# EAGLE board 13240-tsunami-panel.v10 (EAGLE 7.5.0), part 1 of 5
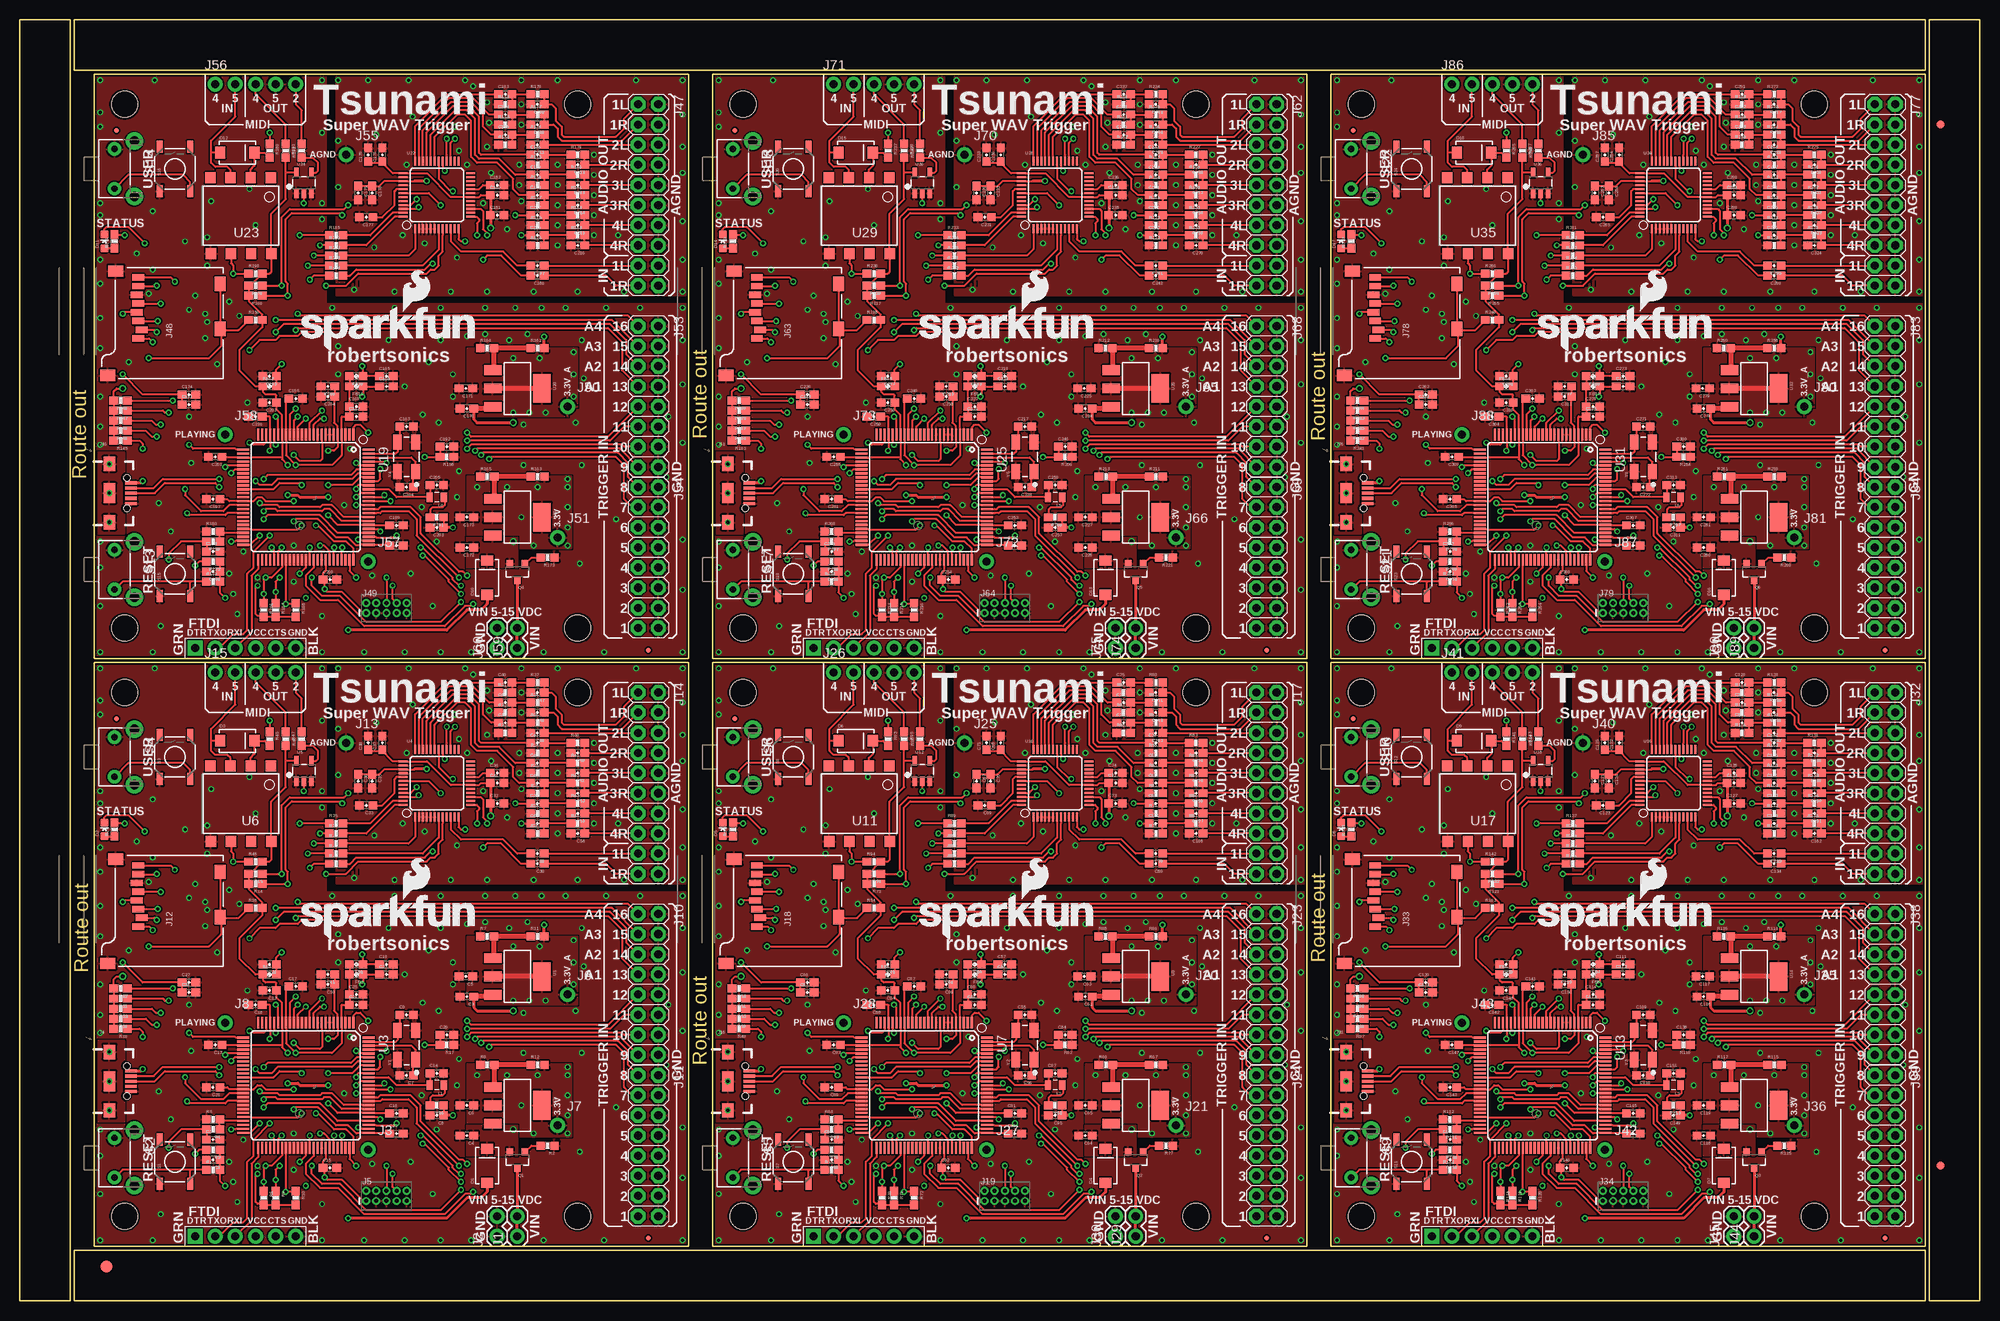
[diagram p0: board, top side]
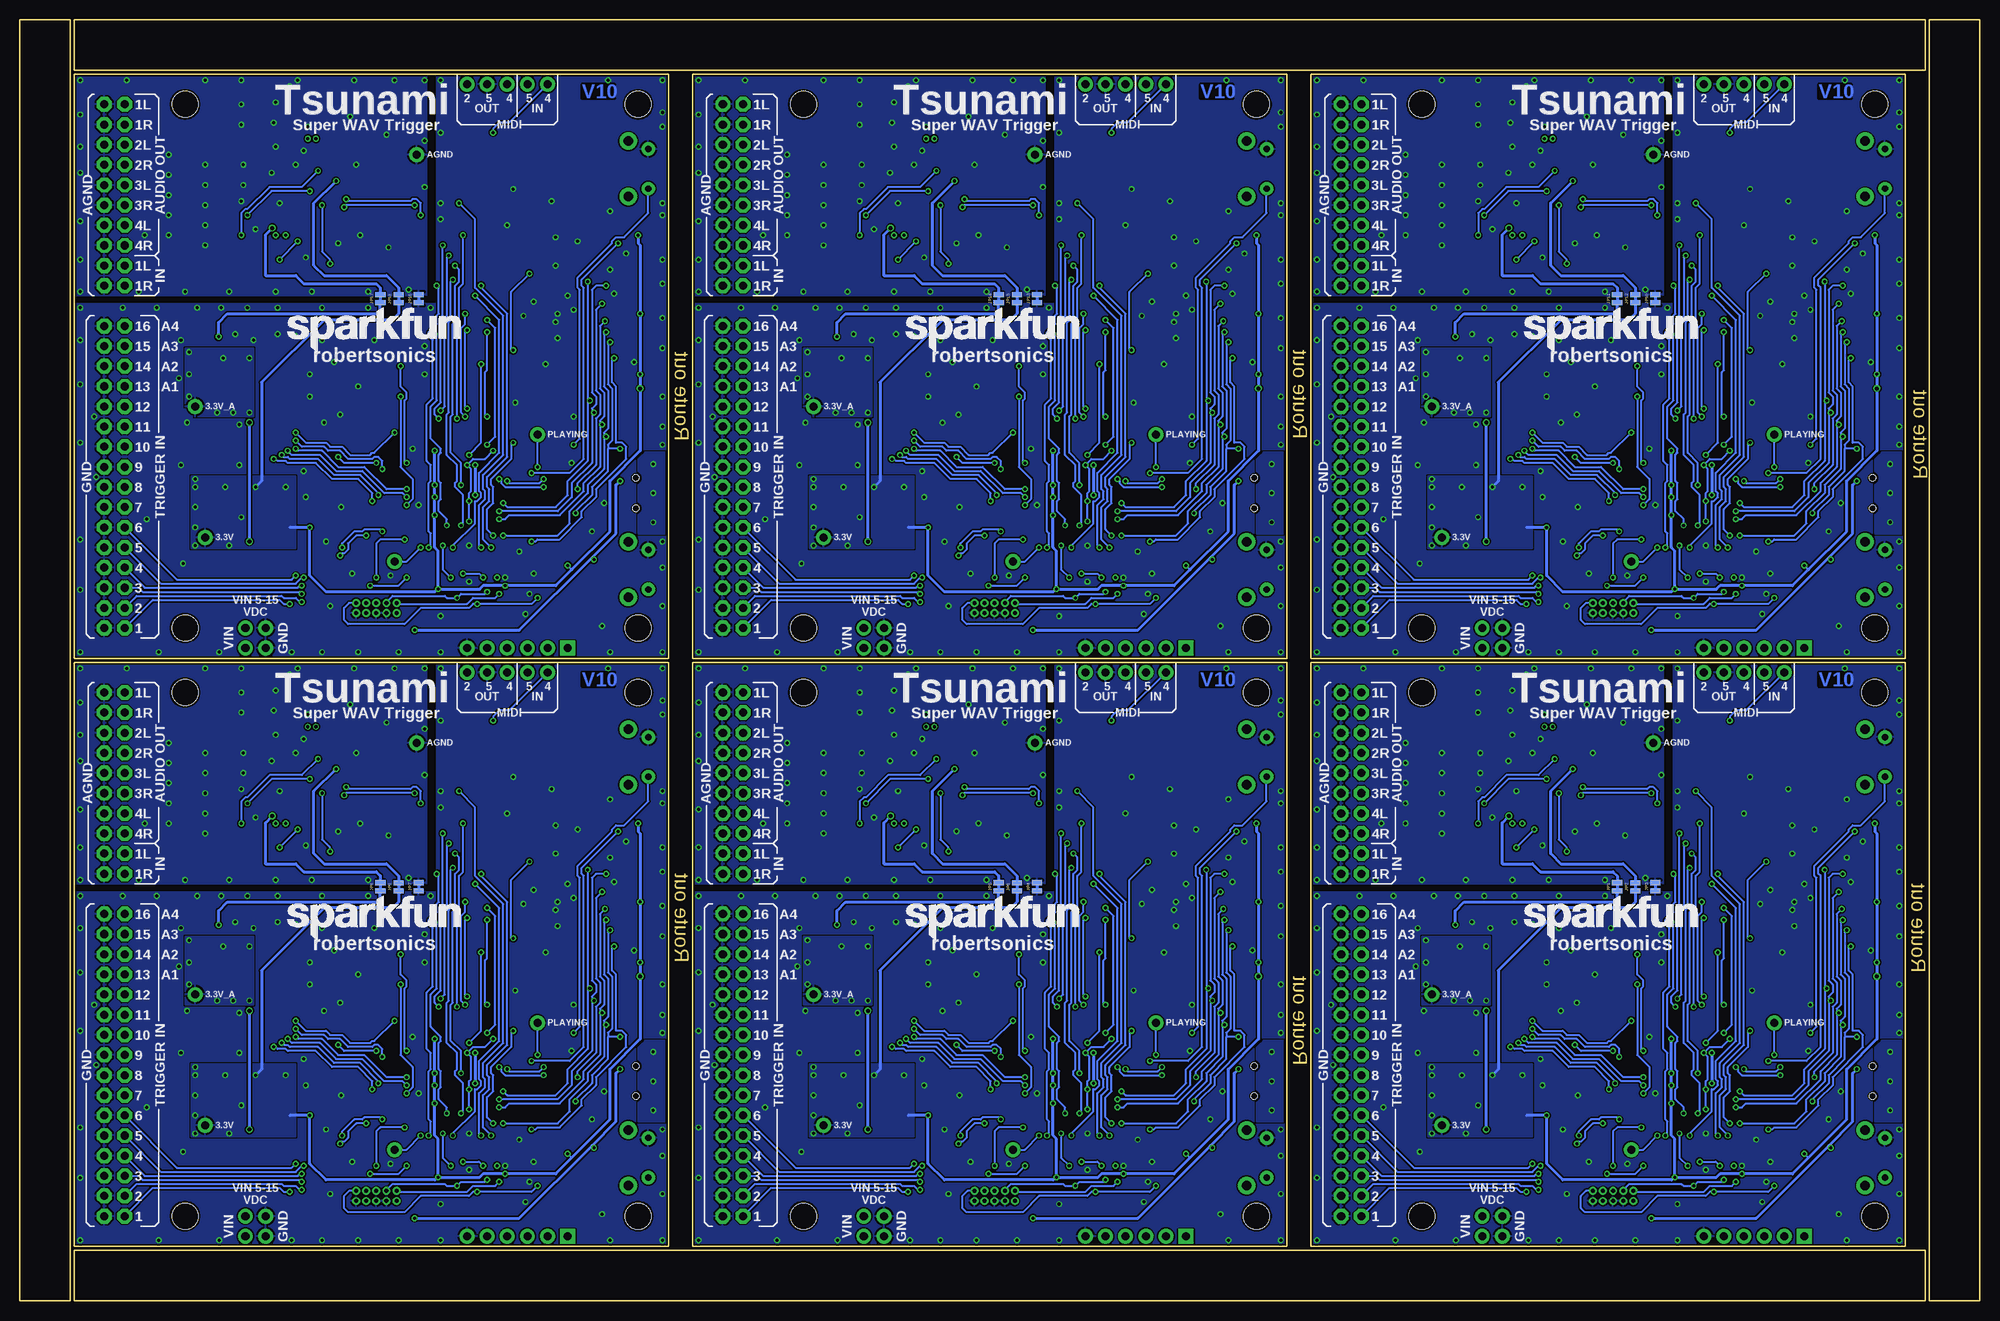
[diagram p1: board, bottom side, seen from below]

Size 247.14 x 161.54 mm. Coordinates in mm from the lower left corner, seen from the top.
Outline: 6.35,79.25 6.35,0 0,0 0,29.72
Outline: 0,27.18 0,161.54 6.35,161.54 6.35,76.71
Outline: 79.25,0 6.86,0 6.86,6.35 29.72,6.35
Outline: 27.18,6.35 240.28,6.35 240.28,0 76.71,0
Outline: 167.89,161.54 240.28,161.54 240.28,155.19 217.42,155.19
Outline: 219.96,155.19 6.86,155.19 6.86,161.54 170.43,161.54
Outline: 240.79,82.3 240.79,161.54 247.14,161.54 247.14,131.83
Outline: 247.14,134.37 247.14,0 240.79,0 240.79,84.84
Outline: 9.4,6.86 84.33,6.86 84.33,80.52 9.4,80.52 9.4,6.86
Outline: 87.38,6.86 162.31,6.86 162.31,80.52 87.38,80.52 87.38,6.86
Outline: 165.35,6.86 240.28,6.86 240.28,80.52 165.35,80.52 165.35,6.86
Outline: 9.4,81.03 84.33,81.03 84.33,154.69 9.4,154.69 9.4,81.03
Outline: 87.38,81.03 162.31,81.03 162.31,154.69 87.38,154.69 87.38,81.03
Outline: 165.35,81.03 240.28,81.03 240.28,154.69 165.35,154.69 165.35,81.03
Copper layers (1*16): Top 0.035mm / dielectric 1.5mm / Bottom 0.035mm
Design rules "SparkFun-2-layer-TIGHT": minimum track width 7mil, minimum drill 15mil, track to track 7mil, track to pad 7mil, pad to pad 7mil, via to via 7mil, smd to smd 7mil, copper to edge 7mil, drill to drill 7mil, minimum pad ring 7mil, minimum via ring 7mil, stop-mask expansion 4mil, vias tented up to drill 20mil, thermal gap 10mil
tRestrict: area 41.1,53.7 to 41.3,54.5; area 41.7,53.7 to 41.8,54.5; area 42.2,53.7 to 42.3,54.5; area 42.7,53.7 to 42.8,54.5; area 29.3,27.8 to 29.5,28.6; area 29.8,27.8 to 30,28.6; area 119.1,53.7 to 119.3,54.5; area 119.6,53.7 to 119.8,54.5; area 120.1,53.7 to 120.3,54.5; area 120.7,53.7 to 120.8,54.5; area 107.3,27.8 to 107.4,28.6; area 107.8,27.8 to 108,28.6; area 197.1,53.7 to 197.2,54.5; area 197.6,53.7 to 197.7,54.5; area 198.1,53.7 to 198.2,54.5; area 198.6,53.7 to 198.8,54.5; area 185.3,27.8 to 185.4,28.6; area 185.8,27.8 to 185.9,28.6; area 41.1,127.9 to 41.3,128.7; area 41.7,127.9 to 41.8,128.7; area 42.2,127.9 to 42.3,128.7; area 42.7,127.9 to 42.8,128.7; area 29.3,102 to 29.5,102.7; area 29.8,102 to 30,102.7; area 119.1,127.9 to 119.3,128.7; area 119.6,127.9 to 119.8,128.7; area 120.1,127.9 to 120.3,128.7; area 120.7,127.9 to 120.8,128.7; area 107.3,102 to 107.4,102.7; area 107.8,102 to 108,102.7; area 197.1,127.9 to 197.2,128.7; area 197.6,127.9 to 197.7,128.7; area 198.1,127.9 to 198.2,128.7; area 198.6,127.9 to 198.8,128.7; area 185.3,102 to 185.4,102.7; area 185.8,102 to 185.9,102.7

## Footprints (pad centres in the part's own frame; a part is rotated, then mirrored left to right if it is on the bottom)
0603-CAP = smd 1.1 x 1: 1 -0.85,0; 2 0.85,0
SMA-DIODE = smd 1.27 x 1.47: A -2.15,0; C 2.15,0
LED-0603 = smd 1 x 1: A 0,-0.877; C 0,0.877
FIDUCIAL-1.5X3 = smd 1.5 x 1.5: 1 0,0
FIDUCIAL-1X2 = smd 1 x 1: 1 0,0
0603 = smd 1.1 x 1: 1 -0.85,0; 2 0.85,0
MICRO-FIDUCIAL = smd 0.635 x 0.635: 1 0,0
STAND-OFF = hole 3.302: 0,0
1X02 = drill 1.016 pad 1.88: 1 0,0; 2 2.54,0
1X01_NO_SILK = drill 1.016 pad 1.88: 1 0,0
USB-B-MICRO-SMD_V03 = smd 1.45 x 0.4: D+ 2.725,0; D- 2.725,0.65; GND 2.725,-1.3; ID 2.725,-0.65; VBUS 2.725,1.3 | smd 1.5 x 1.8: SHIELD1 0,3.685; SHIELD2 0,-3.685 | smd 1.5 x 2.5: SHIELD3 0,0 | hole 0.85: 2.2,1.9; 2.2,-1.9
2X5-PTH-1.27MM = drill 0.508 pad 1: 1 -2.54,-0.635; 2 -2.54,0.635; 3 -1.27,-0.635; 4 -1.27,0.635; 5 0,-0.635; 6 0,0.635; 7 1.27,-0.635; 8 1.27,0.635; 9 2.54,-0.635; 10 2.54,0.635
FTDI_DEVICE_SIDE = drill 1.016 pad 1.88 square: P$1 -6.35,0 | drill 1.016 pad 1.88: P$2 -3.81,0; P$3 -1.27,0; P$4 1.27,0; P$5 3.81,0; P$6 6.35,0
2X8 = drill 1.016 pad 1.88 octagon: 1 0,0; 2 0,2.54; 3 2.54,0; 4 2.54,2.54; 5 5.08,0; 6 5.08,2.54; 7 7.62,0; 8 7.62,2.54; 9 10.16,0; 10 10.16,2.54; 11 12.7,0; 12 12.7,2.54; 13 15.24,0; 14 15.24,2.54; 15 17.78,0; 16 17.78,2.54
MICRO-SD-SOCKET-SDIO = smd 1.8 x 1.4: CD1 11.92,0.4; CD2 6.22,0.4 | smd 0.8 x 1.5: CD/DAT3 6.13,10.3; CLK 9.43,10.7; CMD 7.23,10.7; DAT0 11.63,10.7; DAT1 12.73,10.7; DAT2 5.03,10.7; GND 10.53,10.9; VCC 8.33,10.9 | smd 1.4 x 1.9: GND1 0.37,14.55; GND3 13.52,13.55
2X10 = drill 1.016 pad 1.88 octagon: 1 -11.43,-1.27; 2 -11.43,1.27; 3 -8.89,-1.27; 4 -8.89,1.27; 5 -6.35,-1.27; 6 -6.35,1.27; 7 -3.81,-1.27; 8 -3.81,1.27; 9 -1.27,-1.27; 10 -1.27,1.27; 11 1.27,-1.27; 12 1.27,1.27; 13 3.81,-1.27; 14 3.81,1.27; 15 6.35,-1.27; 16 6.35,1.27; 17 8.89,-1.27; 18 8.89,1.27; 19 11.43,-1.27; 20 11.43,1.27
1X05_NO_SILK = drill 1.016 pad 1.88: 1 0,0; 2 2.54,0; 3 5.08,0; 4 7.62,0; 5 10.16,0
PAD-JUMPER-2-NC_BY_TRACE_NO_SILK = smd 0.635 x 1.27: 1 -0.508,0; 2 0.508,0
0805 = smd 0.8 x 1.2: 1 -0.9,0; 2 0.9,0
SOT23-3 = smd 0.8 x 0.9: 1 -0.95,-1; 2 0.95,-1; 3 0,1.1
0603-RES = smd 1.1 x 1: 1 -0.85,0; 2 0.85,0
TACTILE-SWITCH-SMD = smd 1.524 x 0.762: 1 -2.794,1.905; 2 2.794,1.905; 3 -2.794,-1.905; 4 2.794,-1.905
TACTILE-PTH-SIDEEZ = drill 0.8 pad 1.7: 1 -2.5,0; 2 2.5,0 | drill 1.2 pad 2.2: ANCHOR1 -3.5,2.5; ANCHOR2 3.5,2.5
TP_15TH = drill 0.381 pad 0.61: P$1 0,0
SOT223 = smd 1.219 x 2.235: 1 -2.311,-3.099; 2 0,-3.099; 3 2.311,-3.099 | smd 3.6 x 2.2: 4 0,3.099
LQFP100 = smd 1.5 x 0.28: 1 -7.9,6; 2 -7.9,5.5; 3 -7.9,5; 4 -7.9,4.5; 5 -7.9,4; 6 -7.9,3.5; 7 -7.9,3; 8 -7.9,2.5; 9 -7.9,2; 10 -7.9,1.5; 11 -7.9,1; 12 -7.9,0.5; 13 -7.9,0; 14 -7.9,-0.5; 15 -7.9,-1; 16 -7.9,-1.5; 17 -7.9,-2; 18 -7.9,-2.5; 19 -7.9,-3; 20 -7.9,-3.5; 21 -7.9,-4; 22 -7.9,-4.5; 23 -7.9,-5; 24 -7.9,-5.5; 25 -7.9,-6; 51 7.9,-6; 52 7.9,-5.5; 53 7.9,-5; 54 7.9,-4.5; 55 7.9,-4; 56 7.9,-3.5; 57 7.9,-3; 58 7.9,-2.5; 59 7.9,-2; 60 7.9,-1.5; 61 7.9,-1; 62 7.9,-0.5; 63 7.9,0; 64 7.9,0.5; 65 7.9,1; 66 7.9,1.5; 67 7.9,2; 68 7.9,2.5; 69 7.9,3; 70 7.9,3.5; 71 7.9,4; 72 7.9,4.5; 73 7.9,5; 74 7.9,5.5; 75 7.9,6 | smd 0.28 x 1.5: 26 -6,-7.9; 27 -5.5,-7.9; 28 -5,-7.9; 29 -4.5,-7.9; 30 -4,-7.9; 31 -3.5,-7.9; 32 -3,-7.9; 33 -2.5,-7.9; 34 -2,-7.9; 35 -1.5,-7.9; 36 -1,-7.9; 37 -0.5,-7.9; 38 0,-7.9; 39 0.5,-7.9; 40 1,-7.9; 41 1.5,-7.9; 42 2,-7.9; 43 2.5,-7.9; 44 3,-7.9; 45 3.5,-7.9; 46 4,-7.9; 47 4.5,-7.9; 48 5,-7.9; 49 5.5,-7.9; 50 6,-7.9; 76 6,7.9; 77 5.5,7.9; 78 5,7.9; 79 4.5,7.9; 80 4,7.9; 81 3.5,7.9; 82 3,7.9; 83 2.5,7.9; 84 2,7.9; 85 1.5,7.9; 86 1,7.9; 87 0.5,7.9; 88 0,7.9; 89 -0.5,7.9; 90 -1,7.9; 91 -1.5,7.9; 92 -2,7.9; 93 -2.5,7.9; 94 -3,7.9; 95 -3.5,7.9; 96 -4,7.9; 97 -4.5,7.9; 98 -5,7.9; 99 -5.5,7.9; 100 -6,7.9
LQFP-48 = smd 0.254 x 1.143: 1 -2.75,-4.25; 2 -2.25,-4.25; 3 -1.75,-4.25; 4 -1.25,-4.25; 5 -0.75,-4.25; 6 -0.25,-4.25; 7 0.25,-4.25; 8 0.75,-4.25; 9 1.25,-4.25; 10 1.75,-4.25; 11 2.25,-4.25; 12 2.75,-4.25; 25 2.75,4.25; 26 2.25,4.25; 27 1.75,4.25; 28 1.25,4.25; 29 0.75,4.25; 30 0.25,4.25; 31 -0.25,4.25; 32 -0.75,4.25; 33 -1.25,4.25; 34 -1.75,4.25; 35 -2.25,4.25; 36 -2.75,4.25 | smd 1.143 x 0.254: 13 4.25,-2.75; 14 4.25,-2.25; 15 4.25,-1.75; 16 4.25,-1.25; 17 4.25,-0.75; 18 4.25,-0.25; 19 4.25,0.25; 20 4.25,0.75; 21 4.25,1.25; 22 4.25,1.75; 23 4.25,2.25; 24 4.25,2.75; 37 -4.25,2.75; 38 -4.25,2.25; 39 -4.25,1.75; 40 -4.25,1.25; 41 -4.25,0.75; 42 -4.25,0.25; 43 -4.25,-0.25; 44 -4.25,-0.75; 45 -4.25,-1.25; 46 -4.25,-1.75; 47 -4.25,-2.25; 48 -4.25,-2.75
SOT23-5 = smd 0.55 x 1.2: 1 -0.95,-1.3; 2 0,-1.3; 3 0.95,-1.3; 4 0.95,1.3; 5 -0.95,1.3
8-SMD = smd 1.3 x 1.4: 1 -3.96,-4.96; 2 -1.42,-4.96; 3 1.12,-4.96; 4 3.66,-4.96; 5 3.59,4.58; 6 1.05,4.58; 7 -1.49,4.58; 8 -4.03,4.58
CRYSTAL-OSC-SMD-5X3 = smd 1.9 x 1.1: 1 -1.85,-1.15; 2 1.85,-1.15; 3 1.85,1.15; 4 -1.85,1.15

## Placement (x,y rotation side)
C1  10nF  [0603-CAP]  24.38,17.78 180 top
C2  10uF  [0603-CAP]  24.38,20.32 0 top
C3  0.1uF  [0603-CAP]  56.39,38.35 180 top
C4  0.1uF  [0603-CAP]  56.39,20.83 180 top
C5  10uF  [0603-CAP]  56.26,40.89 180 top
C6  10uF  [0603-CAP]  56.39,24.64 180 top
C7  12pF  [0603-CAP]  48.77,28.45 180 top
C8  0.1uF  [0603-CAP]  52.58,23.37 180 top
C9  12pF  [0603-CAP]  48.77,36.07 0 top
C10  0.1uF  [0603-CAP]  38.86,39.88 180 top
C11  10uF  [0603-CAP]  38.86,41.15 180 top
C12  0.1uF  [0603-CAP]  31.5,39.12 180 top
C13  0.1uF  [0603-CAP]  24.64,32.26 180 top
C14  4.7uF  [0603-CAP]  52.58,28.7 0 top
C15  0.1uF  [0603-CAP]  39.12,16.76 0 top
C16  0.1uF  [0603-CAP]  47.5,23.62 0 top
C17  0.1uF  [0603-CAP]  34.8,39.62 0 top
C18  0.1uF  [0603-CAP]  29.72,37.34 180 top
C19  0.1uF  [0603-CAP]  46.23,42.42 0 top
C20  10pF  [0603-CAP]  53.85,33.53 0 top
C21  0.1uF  [0603-CAP]  24.38,26.92 180 top
C22  0.1uF  [0603-CAP]  47.5,21.08 0 top
C23  0.1uF  [0603-CAP]  46.23,41.15 0 top
C24  0.1uF  [0603-CAP]  42.42,37.34 0 top
C25  2.2uF  [0603-CAP]  42.42,38.61 0 top
C26  0.1uF  [0603-CAP]  31.5,42.42 180 top
C27  10uF  [0603-CAP]  21.34,40.13 0 top
C28  0.1uF  [0603-CAP]  21.34,38.86 0 top
C29  1.0uF  [0603-CAP]  65.28,56.39 180 top
C30  1.0uF  [0603-CAP]  65.28,55.12 180 top
C31  0.1uF  [0603-CAP]  60.2,65.28 0 top
C32  1.0uF  [0603-CAP]  60.2,62.74 0 top
C33  1.0uF  [0603-CAP]  43.69,62.48 180 top
C34  1.0uF  [0603-CAP]  60.2,66.55 0 top
C35  0.1uF  [0603-CAP]  44.45,65.53 270 top
C36  1.0uF  [0603-CAP]  42.67,65.53 270 top
C37  0.1uF  [0603-CAP]  45.72,70.36 90 top
C38  1.0uF  [0603-CAP]  43.94,70.36 90 top
C39  1.0uF  [0603-CAP]  65.28,62.74 0 top
C40  1.0uF  [0603-CAP]  61.21,77.98 0 top
C41  1.0uF  [0603-CAP]  65.28,70.36 0 top
C42  1.0uF  [0603-CAP]  65.28,60.2 0 top
C43  1.0uF  [0603-CAP]  61.21,75.44 0 top
C44  1.0uF  [0603-CAP]  65.28,67.82 0 top
C45  1.0uF  [0603-CAP]  61.21,72.9 0 top
C46  1.0uF  [0603-CAP]  65.28,65.28 0 top
C47  0.1uF  [0603-CAP]  65.28,76.71 180 top
C48  0.1uF  [0603-CAP]  65.28,74.17 180 top
C49  0.1uF  [0603-CAP]  65.28,71.63 180 top
C50  0.1uF  [0603-CAP]  70.36,69.09 180 top
C51  0.1uF  [0603-CAP]  70.36,66.55 180 top
C52  0.1uF  [0603-CAP]  70.36,64.01 180 top
C53  0.1uF  [0603-CAP]  70.36,61.47 180 top
C54  0.1uF  [0603-CAP]  70.36,58.93 180 top
C55  12pF  [0603-CAP]  126.75,36.07 0 top
C56  12pF  [0603-CAP]  126.75,28.45 180 top
C57  0.1uF  [0603-CAP]  124.21,42.42 0 top
C58  0.1uF  [0603-CAP]  124.21,41.15 0 top
C59  0.1uF  [0603-CAP]  120.4,37.34 0 top
C60  2.2uF  [0603-CAP]  120.4,38.61 0 top
C61  10uF  [0603-CAP]  116.84,41.15 180 top
C62  0.1uF  [0603-CAP]  134.37,38.35 180 top
C63  10uF  [0603-CAP]  134.24,40.89 180 top
C64  0.1uF  [0603-CAP]  134.37,20.83 180 top
C65  10uF  [0603-CAP]  134.37,24.64 180 top
C66  10uF  [0603-CAP]  99.31,40.13 0 top
C67  1.0uF  [0603-CAP]  120.65,65.53 270 top
C68  0.1uF  [0603-CAP]  123.7,70.36 90 top
C69  1.0uF  [0603-CAP]  121.67,62.48 180 top
C70  0.1uF  [0603-CAP]  122.43,65.53 270 top
C71  1.0uF  [0603-CAP]  121.92,70.36 90 top
C72  0.1uF  [0603-CAP]  138.18,65.28 0 top
C73  1.0uF  [0603-CAP]  138.18,62.74 0 top
C74  1.0uF  [0603-CAP]  138.18,66.55 0 top
C75  1.0uF  [0603-CAP]  139.19,77.98 0 top
C76  1.0uF  [0603-CAP]  139.19,75.44 0 top
C77  1.0uF  [0603-CAP]  139.19,72.9 0 top
C78  1.0uF  [0603-CAP]  143.26,70.36 0 top
C79  1.0uF  [0603-CAP]  143.26,56.39 180 top
C80  1.0uF  [0603-CAP]  143.26,55.12 180 top
C81  1.0uF  [0603-CAP]  143.26,67.82 0 top
C82  1.0uF  [0603-CAP]  143.26,65.28 0 top
C83  0.1uF  [0603-CAP]  99.31,38.86 0 top
C84  10pF  [0603-CAP]  131.83,33.53 0 top
C85  0.1uF  [0603-CAP]  109.47,42.42 180 top
C86  10uF  [0603-CAP]  102.36,20.32 0 top
C87  0.1uF  [0603-CAP]  112.78,39.62 0 top
C88  0.1uF  [0603-CAP]  107.7,37.34 180 top
C89  0.1uF  [0603-CAP]  102.36,26.92 180 top
C90  0.1uF  [0603-CAP]  125.48,21.08 0 top
C91  0.1uF  [0603-CAP]  125.48,23.62 0 top
C92  0.1uF  [0603-CAP]  117.09,16.76 0 top
C93  0.1uF  [0603-CAP]  102.62,32.26 180 top
C94  0.1uF  [0603-CAP]  109.47,39.12 180 top
C95  0.1uF  [0603-CAP]  130.56,23.37 180 top
C96  0.1uF  [0603-CAP]  116.84,39.88 180 top
C97  4.7uF  [0603-CAP]  130.56,28.7 0 top
C98  10nF  [0603-CAP]  102.36,17.78 180 top
C99  1.0uF  [0603-CAP]  143.26,62.74 0 top
C100  1.0uF  [0603-CAP]  143.26,60.2 0 top
C101  0.1uF  [0603-CAP]  143.26,76.71 180 top
C102  0.1uF  [0603-CAP]  143.26,74.17 180 top
C103  0.1uF  [0603-CAP]  143.26,71.63 180 top
C104  0.1uF  [0603-CAP]  148.34,69.09 180 top
C105  0.1uF  [0603-CAP]  148.34,66.55 180 top
C106  0.1uF  [0603-CAP]  148.34,64.01 180 top
C107  0.1uF  [0603-CAP]  148.34,61.47 180 top
C108  0.1uF  [0603-CAP]  148.34,58.93 180 top
C109  12pF  [0603-CAP]  204.72,36.07 0 top
C110  12pF  [0603-CAP]  204.72,28.45 180 top
C111  0.1uF  [0603-CAP]  202.18,42.42 0 top
C112  0.1uF  [0603-CAP]  202.18,41.15 0 top
C113  0.1uF  [0603-CAP]  198.37,37.34 0 top
C114  2.2uF  [0603-CAP]  198.37,38.61 0 top
C115  10uF  [0603-CAP]  194.82,41.15 180 top
C116  0.1uF  [0603-CAP]  212.34,38.35 180 top
C117  10uF  [0603-CAP]  212.22,40.89 180 top
C118  0.1uF  [0603-CAP]  212.34,20.83 180 top
C119  10uF  [0603-CAP]  212.34,24.64 180 top
C120  10uF  [0603-CAP]  177.29,40.13 0 top
C121  1.0uF  [0603-CAP]  198.63,65.53 270 top
C122  0.1uF  [0603-CAP]  201.68,70.36 90 top
C123  1.0uF  [0603-CAP]  199.64,62.48 180 top
C124  0.1uF  [0603-CAP]  200.41,65.53 270 top
C125  1.0uF  [0603-CAP]  199.9,70.36 90 top
C126  0.1uF  [0603-CAP]  216.15,65.28 0 top
C127  1.0uF  [0603-CAP]  216.15,62.74 0 top
C128  1.0uF  [0603-CAP]  216.15,66.55 0 top
C129  1.0uF  [0603-CAP]  217.17,77.98 0 top
C130  1.0uF  [0603-CAP]  217.17,75.44 0 top
C131  1.0uF  [0603-CAP]  217.17,72.9 0 top
C132  1.0uF  [0603-CAP]  221.23,70.36 0 top
C133  1.0uF  [0603-CAP]  221.23,56.39 180 top
C134  1.0uF  [0603-CAP]  221.23,55.12 180 top
C135  1.0uF  [0603-CAP]  221.23,67.82 0 top
C136  1.0uF  [0603-CAP]  221.23,65.28 0 top
C137  0.1uF  [0603-CAP]  177.29,38.86 0 top
C138  10pF  [0603-CAP]  209.8,33.53 0 top
C139  0.1uF  [0603-CAP]  187.45,42.42 180 top
C140  10uF  [0603-CAP]  180.34,20.32 0 top
C141  0.1uF  [0603-CAP]  190.75,39.62 0 top
C142  0.1uF  [0603-CAP]  185.67,37.34 180 top
C143  0.1uF  [0603-CAP]  180.34,26.92 180 top
C144  0.1uF  [0603-CAP]  203.45,21.08 0 top
C145  0.1uF  [0603-CAP]  203.45,23.62 0 top
C146  0.1uF  [0603-CAP]  195.07,16.76 0 top
C147  0.1uF  [0603-CAP]  180.59,32.26 180 top
C148  0.1uF  [0603-CAP]  187.45,39.12 180 top
C149  0.1uF  [0603-CAP]  208.53,23.37 180 top
C150  0.1uF  [0603-CAP]  194.82,39.88 180 top
C151  4.7uF  [0603-CAP]  208.53,28.7 0 top
C152  10nF  [0603-CAP]  180.34,17.78 180 top
C153  1.0uF  [0603-CAP]  221.23,62.74 0 top
C154  1.0uF  [0603-CAP]  221.23,60.2 0 top
C155  0.1uF  [0603-CAP]  221.23,76.71 180 top
C156  0.1uF  [0603-CAP]  221.23,74.17 180 top
C157  0.1uF  [0603-CAP]  221.23,71.63 180 top
C158  0.1uF  [0603-CAP]  226.31,69.09 180 top
C159  0.1uF  [0603-CAP]  226.31,66.55 180 top
C160  0.1uF  [0603-CAP]  226.31,64.01 180 top
C161  0.1uF  [0603-CAP]  226.31,61.47 180 top
C162  0.1uF  [0603-CAP]  226.31,58.93 180 top
C163  12pF  [0603-CAP]  48.77,110.24 0 top
C164  12pF  [0603-CAP]  48.77,102.62 180 top
C165  0.1uF  [0603-CAP]  46.23,116.59 0 top
C166  0.1uF  [0603-CAP]  46.23,115.32 0 top
C167  0.1uF  [0603-CAP]  42.42,111.51 0 top
C168  2.2uF  [0603-CAP]  42.42,112.78 0 top
C169  10uF  [0603-CAP]  38.86,115.32 180 top
C170  0.1uF  [0603-CAP]  56.39,112.52 180 top
C171  10uF  [0603-CAP]  56.26,115.06 180 top
C172  0.1uF  [0603-CAP]  56.39,95 180 top
C173  10uF  [0603-CAP]  56.39,98.81 180 top
C174  10uF  [0603-CAP]  21.34,114.3 0 top
C175  1.0uF  [0603-CAP]  42.67,139.7 270 top
C176  0.1uF  [0603-CAP]  45.72,144.53 90 top
C177  1.0uF  [0603-CAP]  43.69,136.65 180 top
C178  0.1uF  [0603-CAP]  44.45,139.7 270 top
C179  1.0uF  [0603-CAP]  43.94,144.53 90 top
C180  0.1uF  [0603-CAP]  60.2,139.45 0 top
C181  1.0uF  [0603-CAP]  60.2,136.91 0 top
C182  1.0uF  [0603-CAP]  60.2,140.72 0 top
C183  1.0uF  [0603-CAP]  61.21,152.15 0 top
C184  1.0uF  [0603-CAP]  61.21,149.61 0 top
C185  1.0uF  [0603-CAP]  61.21,147.07 0 top
C186  1.0uF  [0603-CAP]  65.28,144.53 0 top
C187  1.0uF  [0603-CAP]  65.28,130.56 180 top
C188  1.0uF  [0603-CAP]  65.28,129.29 180 top
C189  1.0uF  [0603-CAP]  65.28,141.99 0 top
C190  1.0uF  [0603-CAP]  65.28,139.45 0 top
C191  0.1uF  [0603-CAP]  21.34,113.03 0 top
C192  10pF  [0603-CAP]  53.85,107.7 0 top
C193  0.1uF  [0603-CAP]  31.5,116.59 180 top
C194  10uF  [0603-CAP]  24.38,94.49 0 top
C195  0.1uF  [0603-CAP]  34.8,113.79 0 top
C196  0.1uF  [0603-CAP]  29.72,111.51 180 top
C197  0.1uF  [0603-CAP]  24.38,101.09 180 top
C198  0.1uF  [0603-CAP]  47.5,95.25 0 top
C199  0.1uF  [0603-CAP]  47.5,97.79 0 top
C200  0.1uF  [0603-CAP]  39.12,90.93 0 top
C201  0.1uF  [0603-CAP]  24.64,106.43 180 top
C202  0.1uF  [0603-CAP]  31.5,113.28 180 top
C203  0.1uF  [0603-CAP]  52.58,97.54 180 top
C204  0.1uF  [0603-CAP]  38.86,114.05 180 top
C205  4.7uF  [0603-CAP]  52.58,102.87 0 top
C206  10nF  [0603-CAP]  24.38,91.95 180 top
C207  1.0uF  [0603-CAP]  65.28,136.91 0 top
C208  1.0uF  [0603-CAP]  65.28,134.37 0 top
C209  0.1uF  [0603-CAP]  65.28,150.88 180 top
C210  0.1uF  [0603-CAP]  65.28,148.34 180 top
C211  0.1uF  [0603-CAP]  65.28,145.8 180 top
C212  0.1uF  [0603-CAP]  70.36,143.26 180 top
C213  0.1uF  [0603-CAP]  70.36,140.72 180 top
C214  0.1uF  [0603-CAP]  70.36,138.18 180 top
C215  0.1uF  [0603-CAP]  70.36,135.64 180 top
C216  0.1uF  [0603-CAP]  70.36,133.1 180 top
C217  12pF  [0603-CAP]  126.75,110.24 0 top
C218  12pF  [0603-CAP]  126.75,102.62 180 top
C219  0.1uF  [0603-CAP]  124.21,116.59 0 top
C220  0.1uF  [0603-CAP]  124.21,115.32 0 top
C221  0.1uF  [0603-CAP]  120.4,111.51 0 top
C222  2.2uF  [0603-CAP]  120.4,112.78 0 top
C223  10uF  [0603-CAP]  116.84,115.32 180 top
C224  0.1uF  [0603-CAP]  134.37,112.52 180 top
C225  10uF  [0603-CAP]  134.24,115.06 180 top
C226  0.1uF  [0603-CAP]  134.37,95 180 top
C227  10uF  [0603-CAP]  134.37,98.81 180 top
C228  10uF  [0603-CAP]  99.31,114.3 0 top
C229  1.0uF  [0603-CAP]  120.65,139.7 270 top
C230  0.1uF  [0603-CAP]  123.7,144.53 90 top
C231  1.0uF  [0603-CAP]  121.67,136.65 180 top
C232  0.1uF  [0603-CAP]  122.43,139.7 270 top
C233  1.0uF  [0603-CAP]  121.92,144.53 90 top
C234  0.1uF  [0603-CAP]  138.18,139.45 0 top
C235  1.0uF  [0603-CAP]  138.18,136.91 0 top
C236  1.0uF  [0603-CAP]  138.18,140.72 0 top
C237  1.0uF  [0603-CAP]  139.19,152.15 0 top
C238  1.0uF  [0603-CAP]  139.19,149.61 0 top
C239  1.0uF  [0603-CAP]  139.19,147.07 0 top
C240  1.0uF  [0603-CAP]  143.26,144.53 0 top
C241  1.0uF  [0603-CAP]  143.26,130.56 180 top
C242  1.0uF  [0603-CAP]  143.26,129.29 180 top
C243  1.0uF  [0603-CAP]  143.26,141.99 0 top
C244  1.0uF  [0603-CAP]  143.26,139.45 0 top
C245  0.1uF  [0603-CAP]  99.31,113.03 0 top
C246  10pF  [0603-CAP]  131.83,107.7 0 top
C247  0.1uF  [0603-CAP]  109.47,116.59 180 top
C248  10uF  [0603-CAP]  102.36,94.49 0 top
C249  0.1uF  [0603-CAP]  112.78,113.79 0 top
C250  0.1uF  [0603-CAP]  107.7,111.51 180 top
C251  0.1uF  [0603-CAP]  102.36,101.09 180 top
C252  0.1uF  [0603-CAP]  125.48,95.25 0 top
C253  0.1uF  [0603-CAP]  125.48,97.79 0 top
C254  0.1uF  [0603-CAP]  117.09,90.93 0 top
C255  0.1uF  [0603-CAP]  102.62,106.43 180 top
C256  0.1uF  [0603-CAP]  109.47,113.28 180 top
C257  0.1uF  [0603-CAP]  130.56,97.54 180 top
C258  0.1uF  [0603-CAP]  116.84,114.05 180 top
C259  4.7uF  [0603-CAP]  130.56,102.87 0 top
C260  10nF  [0603-CAP]  102.36,91.95 180 top
C261  1.0uF  [0603-CAP]  143.26,136.91 0 top
C262  1.0uF  [0603-CAP]  143.26,134.37 0 top
C263  0.1uF  [0603-CAP]  143.26,150.88 180 top
C264  0.1uF  [0603-CAP]  143.26,148.34 180 top
C265  0.1uF  [0603-CAP]  143.26,145.8 180 top
C266  0.1uF  [0603-CAP]  148.34,143.26 180 top
C267  0.1uF  [0603-CAP]  148.34,140.72 180 top
C268  0.1uF  [0603-CAP]  148.34,138.18 180 top
C269  0.1uF  [0603-CAP]  148.34,135.64 180 top
C270  0.1uF  [0603-CAP]  148.34,133.1 180 top
C271  12pF  [0603-CAP]  204.72,110.24 0 top
C272  12pF  [0603-CAP]  204.72,102.62 180 top
C273  0.1uF  [0603-CAP]  202.18,116.59 0 top
C274  0.1uF  [0603-CAP]  202.18,115.32 0 top
C275  0.1uF  [0603-CAP]  198.37,111.51 0 top
C276  2.2uF  [0603-CAP]  198.37,112.78 0 top
C277  10uF  [0603-CAP]  194.82,115.32 180 top
C278  0.1uF  [0603-CAP]  212.34,112.52 180 top
C279  10uF  [0603-CAP]  212.22,115.06 180 top
C280  0.1uF  [0603-CAP]  212.34,95 180 top
C281  10uF  [0603-CAP]  212.34,98.81 180 top
C282  10uF  [0603-CAP]  177.29,114.3 0 top
C283  1.0uF  [0603-CAP]  198.63,139.7 270 top
C284  0.1uF  [0603-CAP]  201.68,144.53 90 top
C285  1.0uF  [0603-CAP]  199.64,136.65 180 top
C286  0.1uF  [0603-CAP]  200.41,139.7 270 top
C287  1.0uF  [0603-CAP]  199.9,144.53 90 top
C288  0.1uF  [0603-CAP]  216.15,139.45 0 top
C289  1.0uF  [0603-CAP]  216.15,136.91 0 top
C290  1.0uF  [0603-CAP]  216.15,140.72 0 top
C291  1.0uF  [0603-CAP]  217.17,152.15 0 top
C292  1.0uF  [0603-CAP]  217.17,149.61 0 top
C293  1.0uF  [0603-CAP]  217.17,147.07 0 top
C294  1.0uF  [0603-CAP]  221.23,144.53 0 top
C295  1.0uF  [0603-CAP]  221.23,130.56 180 top
C296  1.0uF  [0603-CAP]  221.23,129.29 180 top
C297  1.0uF  [0603-CAP]  221.23,141.99 0 top
C298  1.0uF  [0603-CAP]  221.23,139.45 0 top
C299  0.1uF  [0603-CAP]  177.29,113.03 0 top
C300  10pF  [0603-CAP]  209.8,107.7 0 top
C301  0.1uF  [0603-CAP]  187.45,116.59 180 top
C302  10uF  [0603-CAP]  180.34,94.49 0 top
C303  0.1uF  [0603-CAP]  190.75,113.79 0 top
C304  0.1uF  [0603-CAP]  185.67,111.51 180 top
C305  0.1uF  [0603-CAP]  180.34,101.09 180 top
C306  0.1uF  [0603-CAP]  203.45,95.25 0 top
C307  0.1uF  [0603-CAP]  203.45,97.79 0 top
C308  0.1uF  [0603-CAP]  195.07,90.93 0 top
C309  0.1uF  [0603-CAP]  180.59,106.43 180 top
C310  0.1uF  [0603-CAP]  187.45,113.28 180 top
C311  0.1uF  [0603-CAP]  208.53,97.54 180 top
C312  0.1uF  [0603-CAP]  194.82,114.05 180 top
C313  4.7uF  [0603-CAP]  208.53,102.87 0 top
C314  10nF  [0603-CAP]  180.34,91.95 180 top
C315  1.0uF  [0603-CAP]  221.23,136.91 0 top
C316  1.0uF  [0603-CAP]  221.23,134.37 0 top
C317  0.1uF  [0603-CAP]  221.23,150.88 180 top
C318  0.1uF  [0603-CAP]  221.23,148.34 180 top
C319  0.1uF  [0603-CAP]  221.23,145.8 180 top
C320  0.1uF  [0603-CAP]  226.31,143.26 180 top
C321  0.1uF  [0603-CAP]  226.31,140.72 180 top
C322  0.1uF  [0603-CAP]  226.31,138.18 180 top
C323  0.1uF  [0603-CAP]  226.31,135.64 180 top
C324  0.1uF  [0603-CAP]  226.31,133.1 180 top
D1  MBRA140  [SMA-DIODE]  58.93,17.02 90 top
D2  BLUE  [LED-0603]  10.67,59.44 0 top
D3  MBRA140  [SMA-DIODE]  27.43,70.61 0 top
D4  MBRA140  [SMA-DIODE]  136.91,17.02 90 top
D5  BLUE  [LED-0603]  88.65,59.44 0 top
D6  MBRA140  [SMA-DIODE]  105.41,70.61 0 top
D7  MBRA140  [SMA-DIODE]  214.88,17.02 90 top
D8  BLUE  [LED-0603]  166.62,59.44 0 top
D9  MBRA140  [SMA-DIODE]  183.39,70.61 0 top
D10  MBRA140  [SMA-DIODE]  58.93,91.19 90 top
D11  BLUE  [LED-0603]  10.67,133.6 0 top
D12  MBRA140  [SMA-DIODE]  27.43,144.78 0 top
D13  MBRA140  [SMA-DIODE]  136.91,91.19 90 top
D14  BLUE  [LED-0603]  88.65,133.6 0 top
D15  MBRA140  [SMA-DIODE]  105.41,144.78 0 top
D16  MBRA140  [SMA-DIODE]  214.88,91.19 90 top
D17  BLUE  [LED-0603]  166.62,133.6 0 top
D18  MBRA140  [SMA-DIODE]  183.39,144.78 0 top
E$1  [FIDUCIAL-1.5X3]  10.92,4.32 0 top
E$7  [FIDUCIAL-1X2]  242.19,148.34 180 top
E$8  [FIDUCIAL-1X2]  242.19,17.02 0 top
FB1  470  [0603]  42.42,42.42 180 top
FB2  470  [0603]  42.42,41.15 180 top
FB3  470  [0603]  31.5,41.15 0 top
FB4  470  [0603]  120.4,42.42 180 top
FB5  470  [0603]  120.4,41.15 180 top
FB6  470  [0603]  109.47,41.15 0 top
FB7  470  [0603]  198.37,42.42 180 top
FB8  470  [0603]  198.37,41.15 180 top
FB9  470  [0603]  187.45,41.15 0 top
FB10  470  [0603]  42.42,116.59 180 top
FB11  470  [0603]  42.42,115.32 180 top
FB12  470  [0603]  31.5,115.32 0 top
FB13  470  [0603]  120.4,116.59 180 top
FB14  470  [0603]  120.4,115.32 180 top
FB15  470  [0603]  109.47,115.32 0 top
FB16  470  [0603]  198.37,116.59 180 top
FB17  470  [0603]  198.37,115.32 180 top
FB18  470  [0603]  187.45,115.32 0 top
FD1  FIDUCIALUFIDUCIAL  [MICRO-FIDUCIAL]  79.25,7.87 0 top
FD2  FIDUCIALUFIDUCIAL  [MICRO-FIDUCIAL]  12.19,73.41 0 top
FD3  FIDUCIALUFIDUCIAL  [MICRO-FIDUCIAL]  157.23,7.87 0 top
FD4  FIDUCIALUFIDUCIAL  [MICRO-FIDUCIAL]  90.17,73.41 0 top
FD5  FIDUCIALUFIDUCIAL  [MICRO-FIDUCIAL]  235.2,7.87 0 top
FD6  FIDUCIALUFIDUCIAL  [MICRO-FIDUCIAL]  168.15,73.41 0 top
FD7  FIDUCIALUFIDUCIAL  [MICRO-FIDUCIAL]  79.25,82.04 0 top
FD8  FIDUCIALUFIDUCIAL  [MICRO-FIDUCIAL]  12.19,147.57 0 top
FD9  FIDUCIALUFIDUCIAL  [MICRO-FIDUCIAL]  157.23,82.04 0 top
FD10  FIDUCIALUFIDUCIAL  [MICRO-FIDUCIAL]  90.17,147.57 0 top
FD11  FIDUCIALUFIDUCIAL  [MICRO-FIDUCIAL]  235.2,82.04 0 top
FD12  FIDUCIALUFIDUCIAL  [MICRO-FIDUCIAL]  168.15,147.57 0 top
H1  STAND-OFF  [STAND-OFF]  13.21,76.71 0 top
H2  STAND-OFF  [STAND-OFF]  70.36,10.67 0 top
H3  STAND-OFF  [STAND-OFF]  13.21,10.67 0 top
H4  STAND-OFF  [STAND-OFF]  70.36,76.71 0 top
H5  STAND-OFF  [STAND-OFF]  91.19,10.67 0 top
H6  STAND-OFF  [STAND-OFF]  91.19,76.71 0 top
H7  STAND-OFF  [STAND-OFF]  148.34,10.67 0 top
H8  STAND-OFF  [STAND-OFF]  148.34,76.71 0 top
H9  STAND-OFF  [STAND-OFF]  169.16,10.67 0 top
H10  STAND-OFF  [STAND-OFF]  169.16,76.71 0 top
H11  STAND-OFF  [STAND-OFF]  226.31,10.67 0 top
H12  STAND-OFF  [STAND-OFF]  226.31,76.71 0 top
H13  STAND-OFF  [STAND-OFF]  13.21,84.84 0 top
H14  STAND-OFF  [STAND-OFF]  13.21,150.88 0 top
H15  STAND-OFF  [STAND-OFF]  70.36,84.84 0 top
H16  STAND-OFF  [STAND-OFF]  70.36,150.88 0 top
H17  STAND-OFF  [STAND-OFF]  91.19,84.84 0 top
H18  STAND-OFF  [STAND-OFF]  91.19,150.88 0 top
H19  STAND-OFF  [STAND-OFF]  148.34,84.84 0 top
H20  STAND-OFF  [STAND-OFF]  148.34,150.88 0 top
H21  STAND-OFF  [STAND-OFF]  169.16,84.84 0 top
H22  STAND-OFF  [STAND-OFF]  169.16,150.88 0 top
H23  STAND-OFF  [STAND-OFF]  226.31,84.84 0 top
H24  STAND-OFF  [STAND-OFF]  226.31,150.88 0 top
J1  VDC-IN  [1X02]  62.74,8.13 90 top
J2  GND-IN  [1X02]  60.2,8.13 90 top
J3  DEBUG  [1X01_NO_SILK]  43.94,19.05 0 top
J4  USB-MICROB"  [USB-B-MICRO-SMD_V03]  11.3,27.69 0 top
J5  CORTEX_DEBUGPTH  [2X5-PTH-1.27MM]  46.23,13.21 0 top
J6  3.3VA  [1X01_NO_SILK]  69.09,38.61 0 top
J7  3.3V  [1X01_NO_SILK]  67.82,22.1 0 top
J8  PLAYING  [1X01_NO_SILK]  25.91,35.05 0 top
J9  FTDI_DEVICE  [FTDI_DEVICE_SIDE]  28.45,8.13 0 top
J10  TRIG2  [2X8]  77.98,48.77 270 top
J11  TRIG1  [2X8]  77.98,28.45 270 top
J12  USD-SDIO-SOCKET  [MICRO-SD-SOCKET-SDIO]  25.65,42.16 90 top
J13  GND  [1X01_NO_SILK]  41.15,70.36 0 top
J14  AUDIO I/O  [2X10]  79.25,65.28 270 top
J15  MIDI  [1X05_NO_SILK]  24.64,79.25 0 top
J16  USB-MICROB"  [USB-B-MICRO-SMD_V03]  89.28,27.69 0 top
J17  AUDIO I/O  [2X10]  157.23,65.28 270 top
J18  USD-SDIO-SOCKET  [MICRO-SD-SOCKET-SDIO]  103.63,42.16 90 top
J19  CORTEX_DEBUGPTH  [2X5-PTH-1.27MM]  124.21,13.21 0 top
J20  3.3VA  [1X01_NO_SILK]  147.07,38.61 0 top
J21  3.3V  [1X01_NO_SILK]  145.8,22.1 0 top
J22  FTDI_DEVICE  [FTDI_DEVICE_SIDE]  106.43,8.13 0 top
J23  TRIG2  [2X8]  155.96,48.77 270 top
J24  TRIG1  [2X8]  155.96,28.45 270 top
J25  GND  [1X01_NO_SILK]  119.13,70.36 0 top
J26  MIDI  [1X05_NO_SILK]  102.62,79.25 0 top
J27  DEBUG  [1X01_NO_SILK]  121.92,19.05 0 top
J28  PLAYING  [1X01_NO_SILK]  103.89,35.05 0 top
J29  VDC-IN  [1X02]  140.72,8.13 90 top
J30  GND-IN  [1X02]  138.18,8.13 90 top
J31  USB-MICROB"  [USB-B-MICRO-SMD_V03]  167.26,27.69 0 top
J32  AUDIO I/O  [2X10]  235.2,65.28 270 top
J33  USD-SDIO-SOCKET  [MICRO-SD-SOCKET-SDIO]  181.61,42.16 90 top
J34  CORTEX_DEBUGPTH  [2X5-PTH-1.27MM]  202.18,13.21 0 top
J35  3.3VA  [1X01_NO_SILK]  225.04,38.61 0 top
J36  3.3V  [1X01_NO_SILK]  223.77,22.1 0 top
J37  FTDI_DEVICE  [FTDI_DEVICE_SIDE]  184.4,8.13 0 top
J38  TRIG2  [2X8]  233.93,48.77 270 top
J39  TRIG1  [2X8]  233.93,28.45 270 top
J40  GND  [1X01_NO_SILK]  197.1,70.36 0 top
J41  MIDI  [1X05_NO_SILK]  180.59,79.25 0 top
J42  DEBUG  [1X01_NO_SILK]  199.9,19.05 0 top
J43  PLAYING  [1X01_NO_SILK]  181.86,35.05 0 top
J44  VDC-IN  [1X02]  218.69,8.13 90 top
J45  GND-IN  [1X02]  216.15,8.13 90 top
J46  USB-MICROB"  [USB-B-MICRO-SMD_V03]  11.3,101.85 0 top
J47  AUDIO I/O  [2X10]  79.25,139.45 270 top
J48  USD-SDIO-SOCKET  [MICRO-SD-SOCKET-SDIO]  25.65,116.33 90 top
J49  CORTEX_DEBUGPTH  [2X5-PTH-1.27MM]  46.23,87.38 0 top
J50  3.3VA  [1X01_NO_SILK]  69.09,112.78 0 top
J51  3.3V  [1X01_NO_SILK]  67.82,96.27 0 top
J52  FTDI_DEVICE  [FTDI_DEVICE_SIDE]  28.45,82.3 0 top
J53  TRIG2  [2X8]  77.98,122.94 270 top
J54  TRIG1  [2X8]  77.98,102.62 270 top
J55  GND  [1X01_NO_SILK]  41.15,144.53 0 top
J56  MIDI  [1X05_NO_SILK]  24.64,153.42 0 top
J57  DEBUG  [1X01_NO_SILK]  43.94,93.22 0 top
J58  PLAYING  [1X01_NO_SILK]  25.91,109.22 0 top
J59  VDC-IN  [1X02]  62.74,82.3 90 top
J60  GND-IN  [1X02]  60.2,82.3 90 top
J61  USB-MICROB"  [USB-B-MICRO-SMD_V03]  89.28,101.85 0 top
J62  AUDIO I/O  [2X10]  157.23,139.45 270 top
J63  USD-SDIO-SOCKET  [MICRO-SD-SOCKET-SDIO]  103.63,116.33 90 top
J64  CORTEX_DEBUGPTH  [2X5-PTH-1.27MM]  124.21,87.38 0 top
J65  3.3VA  [1X01_NO_SILK]  147.07,112.78 0 top
J66  3.3V  [1X01_NO_SILK]  145.8,96.27 0 top
J67  FTDI_DEVICE  [FTDI_DEVICE_SIDE]  106.43,82.3 0 top
J68  TRIG2  [2X8]  155.96,122.94 270 top
J69  TRIG1  [2X8]  155.96,102.62 270 top
J70  GND  [1X01_NO_SILK]  119.13,144.53 0 top
J71  MIDI  [1X05_NO_SILK]  102.62,153.42 0 top
J72  DEBUG  [1X01_NO_SILK]  121.92,93.22 0 top
J73  PLAYING  [1X01_NO_SILK]  103.89,109.22 0 top
J74  VDC-IN  [1X02]  140.72,82.3 90 top
J75  GND-IN  [1X02]  138.18,82.3 90 top
J76  USB-MICROB"  [USB-B-MICRO-SMD_V03]  167.26,101.85 0 top
J77  AUDIO I/O  [2X10]  235.2,139.45 270 top
J78  USD-SDIO-SOCKET  [MICRO-SD-SOCKET-SDIO]  181.61,116.33 90 top
J79  CORTEX_DEBUGPTH  [2X5-PTH-1.27MM]  202.18,87.38 0 top
J80  3.3VA  [1X01_NO_SILK]  225.04,112.78 0 top
J81  3.3V  [1X01_NO_SILK]  223.77,96.27 0 top
J82  FTDI_DEVICE  [FTDI_DEVICE_SIDE]  184.4,82.3 0 top
J83  TRIG2  [2X8]  233.93,122.94 270 top
J84  TRIG1  [2X8]  233.93,102.62 270 top
J85  GND  [1X01_NO_SILK]  197.1,144.53 0 top
J86  MIDI  [1X05_NO_SILK]  180.59,153.42 0 top
J87  DEBUG  [1X01_NO_SILK]  199.9,93.22 0 top
J88  PLAYING  [1X01_NO_SILK]  181.86,109.22 0 top
J89  VDC-IN  [1X02]  218.69,82.3 90 top
J90  GND-IN  [1X02]  216.15,82.3 90 top
JP1  JUMPER-PAD-2-NC_BY_TRACENO_SILK  [PAD-JUMPER-2-NC_BY_TRACE_NO_SILK]  45.72,52.21 90 bottom
JP2  JUMPER-PAD-2-NC_BY_TRACENO_SILK  [PAD-JUMPER-2-NC_BY_TRACE_NO_SILK]  43.43,52.2 90 bottom
JP3  JUMPER-PAD-2-NC_BY_TRACENO_SILK  [PAD-JUMPER-2-NC_BY_TRACE_NO_SILK]  40.89,52.21 90 bottom
JP4  JUMPER-PAD-2-NC_BY_TRACENO_SILK  [PAD-JUMPER-2-NC_BY_TRACE_NO_SILK]  118.87,52.21 90 bottom
JP5  JUMPER-PAD-2-NC_BY_TRACENO_SILK  [PAD-JUMPER-2-NC_BY_TRACE_NO_SILK]  123.7,52.21 90 bottom
JP6  JUMPER-PAD-2-NC_BY_TRACENO_SILK  [PAD-JUMPER-2-NC_BY_TRACE_NO_SILK]  121.41,52.2 90 bottom
JP7  JUMPER-PAD-2-NC_BY_TRACENO_SILK  [PAD-JUMPER-2-NC_BY_TRACE_NO_SILK]  196.85,52.21 90 bottom
JP8  JUMPER-PAD-2-NC_BY_TRACENO_SILK  [PAD-JUMPER-2-NC_BY_TRACE_NO_SILK]  201.68,52.21 90 bottom
JP9  JUMPER-PAD-2-NC_BY_TRACENO_SILK  [PAD-JUMPER-2-NC_BY_TRACE_NO_SILK]  199.39,52.2 90 bottom
JP10  JUMPER-PAD-2-NC_BY_TRACENO_SILK  [PAD-JUMPER-2-NC_BY_TRACE_NO_SILK]  40.89,126.38 90 bottom
JP11  JUMPER-PAD-2-NC_BY_TRACENO_SILK  [PAD-JUMPER-2-NC_BY_TRACE_NO_SILK]  45.72,126.38 90 bottom
JP12  JUMPER-PAD-2-NC_BY_TRACENO_SILK  [PAD-JUMPER-2-NC_BY_TRACE_NO_SILK]  43.43,126.36 90 bottom
JP13  JUMPER-PAD-2-NC_BY_TRACENO_SILK  [PAD-JUMPER-2-NC_BY_TRACE_NO_SILK]  118.87,126.38 90 bottom
JP14  JUMPER-PAD-2-NC_BY_TRACENO_SILK  [PAD-JUMPER-2-NC_BY_TRACE_NO_SILK]  123.7,126.38 90 bottom
JP15  JUMPER-PAD-2-NC_BY_TRACENO_SILK  [PAD-JUMPER-2-NC_BY_TRACE_NO_SILK]  121.41,126.36 90 bottom
JP16  JUMPER-PAD-2-NC_BY_TRACENO_SILK  [PAD-JUMPER-2-NC_BY_TRACE_NO_SILK]  196.85,126.38 90 bottom
JP17  JUMPER-PAD-2-NC_BY_TRACENO_SILK  [PAD-JUMPER-2-NC_BY_TRACE_NO_SILK]  201.68,126.38 90 bottom
JP18  JUMPER-PAD-2-NC_BY_TRACENO_SILK  [PAD-JUMPER-2-NC_BY_TRACE_NO_SILK]  199.39,126.36 90 bottom
L1  10uH  [0805]  52.58,27.18 180 top
L2  10uH  [0805]  130.56,27.18 180 top
L3  10uH  [0805]  208.53,27.18 180 top
L4  10uH  [0805]  52.58,101.35 180 top
L5  10uH  [0805]  130.56,101.35 180 top
L6  10uH  [0805]  208.53,101.35 180 top
LOGO1  SFE_LOGO_NAME.2_INCH  [SFE_LOGO_NAME_.2]  57.4,45.47 0 bottom
LOGO2  SFE_LOGO_NAME.2_INCH  [SFE_LOGO_NAME_.2]  135.38,45.47 0 bottom
LOGO3  SFE_LOGO_NAME_FLAME.2_INCH  [SFE_LOGO_NAME_FLAME_.2]  112.78,45.47 0 top
LOGO4  SFE_LOGO_NAME_FLAME.2_INCH  [SFE_LOGO_NAME_FLAME_.2]  34.8,45.47 0 top
LOGO5  SFE_LOGO_NAME.2_INCH  [SFE_LOGO_NAME_.2]  213.36,45.47 0 bottom
LOGO6  SFE_LOGO_NAME_FLAME.2_INCH  [SFE_LOGO_NAME_FLAME_.2]  190.75,45.47 0 top
LOGO7  SFE_LOGO_NAME.2_INCH  [SFE_LOGO_NAME_.2]  57.4,119.63 0 bottom
LOGO8  SFE_LOGO_NAME_FLAME.2_INCH  [SFE_LOGO_NAME_FLAME_.2]  34.8,119.63 0 top
LOGO9  SFE_LOGO_NAME.2_INCH  [SFE_LOGO_NAME_.2]  135.38,119.63 0 bottom
LOGO10  SFE_LOGO_NAME_FLAME.2_INCH  [SFE_LOGO_NAME_FLAME_.2]  112.78,119.63 0 top
LOGO11  SFE_LOGO_NAME.2_INCH  [SFE_LOGO_NAME_.2]  213.36,119.63 0 bottom
LOGO12  SFE_LOGO_NAME_FLAME.2_INCH  [SFE_LOGO_NAME_FLAME_.2]  190.75,119.63 0 top
Q1  2.5A/30V  [SOT23-3]  62.74,17.78 180 top
Q2  2.5A/30V  [SOT23-3]  140.72,17.78 180 top
Q3  2.5A/30V  [SOT23-3]  218.69,17.78 180 top
Q4  2.5A/30V  [SOT23-3]  62.74,91.95 180 top
Q5  2.5A/30V  [SOT23-3]  140.72,91.95 180 top
Q6  2.5A/30V  [SOT23-3]  218.69,91.95 180 top
R1  33  [0603-RES]  24.38,16.51 0 top
R2  1M  [0603-RES]  66.55,19.56 180 top
R3  10K  [0603-RES]  24.38,19.05 180 top
R4  15K  [0603-RES]  24.38,21.59 180 top
R5  22K  [0603-RES]  24.38,22.86 0 top
R6  100k  [0603-RES]  30.73,12.95 270 top
R7  390  [0603-RES]  58.93,45.97 0 top
R8  390  [0603-RES]  58.96,29.77 0 top
R9  100k  [0603-RES]  32.26,12.95 270 top
R10  100k  [0603-RES]  34.8,12.95 270 top
R11  240  [0603-RES]  65.28,45.97 0 top
R12  240  [0603-RES]  65.31,29.77 0 top
R13  330  [0603-RES]  11.94,59.44 90 top
R14  4.7K  [0603-RES]  29.72,52.58 180 top
R15  4.7K  [0603-RES]  29.72,53.85 180 top
R16  2.2  [0603-RES]  52.58,24.64 180 top
R17  5.62k  [0603-RES]  53.85,32.26 180 top
R18  10K  [0603-RES]  29.72,49.53 0 top
R19  100k  [0603-RES]  12.7,34.29 180 top
R20  100k  [0603-RES]  12.7,35.56 180 top
R21  100k  [0603-RES]  12.7,38.1 180 top
R22  100k  [0603-RES]  12.7,39.37 180 top
R23  10K  [0603-RES]  12.7,36.83 180 top
R24  100  [0603-RES]  39.88,55.12 0 top
R25  100  [0603-RES]  39.88,60.2 0 top
R26  100  [0603-RES]  39.88,58.93 0 top
R27  100  [0603-RES]  39.88,57.66 0 top
R28  100  [0603-RES]  39.88,56.39 0 top
R29  100k  [0603-RES]  65.28,61.47 0 top
R30  100k  [0603-RES]  65.28,58.93 0 top
R31  100k  [0603-RES]  61.21,76.71 0 top
R32  100k  [0603-RES]  61.21,74.17 0 top
R33  100k  [0603-RES]  61.21,71.63 0 top
R34  100k  [0603-RES]  65.28,69.09 0 top
R35  100k  [0603-RES]  65.28,66.55 0 top
R36  100k  [0603-RES]  65.28,64.01 0 top
R37  10  [0603-RES]  65.28,77.98 0 top
R38  10  [0603-RES]  65.28,75.44 0 top
R39  10  [0603-RES]  65.28,72.9 0 top
R40  10  [0603-RES]  70.36,70.36 0 top
R41  10  [0603-RES]  70.36,67.82 0 top
R42  10  [0603-RES]  70.36,65.28 0 top
R43  10  [0603-RES]  70.36,62.74 0 top
R44  10  [0603-RES]  70.36,60.2 0 top
R45  220  [0603-RES]  31.5,70.87 270 top
R46  220  [0603-RES]  35.56,70.87 90 top
R47  220  [0603-RES]  33.53,70.87 270 top
R48  220  [0603-RES]  29.72,55.37 0 top
R49  100k  [0603-RES]  90.68,34.29 180 top
R50  100k  [0603-RES]  90.68,35.56 180 top
R51  100k  [0603-RES]  90.68,38.1 180 top
R52  100k  [0603-RES]  90.68,39.37 180 top
R53  10K  [0603-RES]  90.68,36.83 180 top
R54  10K  [0603-RES]  107.7,49.53 0 top
R55  330  [0603-RES]  89.92,59.44 90 top
R56  100k  [0603-RES]  139.19,76.71 0 top
R57  100k  [0603-RES]  139.19,74.17 0 top
R58  100k  [0603-RES]  139.19,71.63 0 top
R59  100k  [0603-RES]  143.26,69.09 0 top
R60  100k  [0603-RES]  143.26,66.55 0 top
R61  100k  [0603-RES]  143.26,64.01 0 top
R62  5.62k  [0603-RES]  131.83,32.26 180 top
R63  15K  [0603-RES]  102.36,21.59 180 top
R64  22K  [0603-RES]  102.36,22.86 0 top
R65  2.2  [0603-RES]  130.56,24.64 180 top
R66  240  [0603-RES]  143.26,45.97 0 top
R67  240  [0603-RES]  143.29,29.77 0 top
R68  390  [0603-RES]  136.91,45.97 0 top
R69  390  [0603-RES]  136.94,29.77 0 top
R70  100k  [0603-RES]  108.71,12.95 270 top
R71  100k  [0603-RES]  110.24,12.95 270 top
R72  100k  [0603-RES]  112.78,12.95 270 top
R73  4.7K  [0603-RES]  107.7,52.58 180 top
R74  4.7K  [0603-RES]  107.7,53.85 180 top
R75  33  [0603-RES]  102.36,16.51 0 top
R76  10K  [0603-RES]  102.36,19.05 180 top
R77  1M  [0603-RES]  144.53,19.56 180 top
R78  100k  [0603-RES]  143.26,58.93 0 top
R79  100k  [0603-RES]  143.26,61.47 0 top
R80  10  [0603-RES]  143.26,77.98 0 top
R81  10  [0603-RES]  143.26,75.44 0 top
R82  10  [0603-RES]  143.26,72.9 0 top
R83  10  [0603-RES]  148.34,70.36 0 top
R84  10  [0603-RES]  148.34,67.82 0 top
R85  10  [0603-RES]  148.34,65.28 0 top
R86  10  [0603-RES]  148.34,62.74 0 top
R87  10  [0603-RES]  148.34,60.2 0 top
R88  100  [0603-RES]  117.86,55.12 0 top
R89  100  [0603-RES]  117.86,60.2 0 top
R90  100  [0603-RES]  117.86,58.93 0 top
R91  100  [0603-RES]  117.86,57.66 0 top
R92  100  [0603-RES]  117.86,56.39 0 top
R93  220  [0603-RES]  109.47,70.87 270 top
R94  220  [0603-RES]  107.7,55.37 0 top
R95  220  [0603-RES]  111.51,70.87 270 top
R96  220  [0603-RES]  113.54,70.87 90 top
R97  100k  [0603-RES]  168.66,34.29 180 top
R98  100k  [0603-RES]  168.66,35.56 180 top
R99  100k  [0603-RES]  168.66,38.1 180 top
R100  100k  [0603-RES]  168.66,39.37 180 top
R101  10K  [0603-RES]  168.66,36.83 180 top
R102  10K  [0603-RES]  185.67,49.53 0 top
R103  330  [0603-RES]  167.89,59.44 90 top
R104  100k  [0603-RES]  217.17,76.71 0 top
R105  100k  [0603-RES]  217.17,74.17 0 top
R106  100k  [0603-RES]  217.17,71.63 0 top
R107  100k  [0603-RES]  221.23,69.09 0 top
R108  100k  [0603-RES]  221.23,66.55 0 top
R109  100k  [0603-RES]  221.23,64.01 0 top
R110  5.62k  [0603-RES]  209.8,32.26 180 top
R111  15K  [0603-RES]  180.34,21.59 180 top
R112  22K  [0603-RES]  180.34,22.86 0 top
R113  2.2  [0603-RES]  208.53,24.64 180 top
R114  240  [0603-RES]  221.23,45.97 0 top
R115  240  [0603-RES]  221.26,29.77 0 top
R116  390  [0603-RES]  214.88,45.97 0 top
R117  390  [0603-RES]  214.91,29.77 0 top
R118  100k  [0603-RES]  186.69,12.95 270 top
R119  100k  [0603-RES]  188.21,12.95 270 top
R120  100k  [0603-RES]  190.75,12.95 270 top
R121  4.7K  [0603-RES]  185.67,52.58 180 top
R122  4.7K  [0603-RES]  185.67,53.85 180 top
R123  33  [0603-RES]  180.34,16.51 0 top
R124  10K  [0603-RES]  180.34,19.05 180 top
R125  1M  [0603-RES]  222.5,19.56 180 top
R126  100k  [0603-RES]  221.23,58.93 0 top
R127  100k  [0603-RES]  221.23,61.47 0 top
R128  10  [0603-RES]  221.23,77.98 0 top
R129  10  [0603-RES]  221.23,75.44 0 top
R130  10  [0603-RES]  221.23,72.9 0 top
R131  10  [0603-RES]  226.31,70.36 0 top
R132  10  [0603-RES]  226.31,67.82 0 top
R133  10  [0603-RES]  226.31,65.28 0 top
R134  10  [0603-RES]  226.31,62.74 0 top
R135  10  [0603-RES]  226.31,60.2 0 top
R136  100  [0603-RES]  195.83,55.12 0 top
R137  100  [0603-RES]  195.83,60.2 0 top
R138  100  [0603-RES]  195.83,58.93 0 top
R139  100  [0603-RES]  195.83,57.66 0 top
R140  100  [0603-RES]  195.83,56.39 0 top
R141  220  [0603-RES]  187.45,70.87 270 top
R142  220  [0603-RES]  185.67,55.37 0 top
R143  220  [0603-RES]  189.48,70.87 270 top
R144  220  [0603-RES]  191.52,70.87 90 top
R145  100k  [0603-RES]  12.7,108.46 180 top
R146  100k  [0603-RES]  12.7,109.73 180 top
R147  100k  [0603-RES]  12.7,112.27 180 top
R148  100k  [0603-RES]  12.7,113.54 180 top
R149  10K  [0603-RES]  12.7,111 180 top
R150  10K  [0603-RES]  29.72,123.7 0 top
R151  330  [0603-RES]  11.94,133.6 90 top
R152  100k  [0603-RES]  61.21,150.88 0 top
R153  100k  [0603-RES]  61.21,148.34 0 top
R154  100k  [0603-RES]  61.21,145.8 0 top
R155  100k  [0603-RES]  65.28,143.26 0 top
R156  100k  [0603-RES]  65.28,140.72 0 top
R157  100k  [0603-RES]  65.28,138.18 0 top
R158  5.62k  [0603-RES]  53.85,106.43 180 top
R159  15K  [0603-RES]  24.38,95.76 180 top
R160  22K  [0603-RES]  24.38,97.03 0 top
R161  2.2  [0603-RES]  52.58,98.81 180 top
R162  240  [0603-RES]  65.28,120.14 0 top
R163  240  [0603-RES]  65.31,103.94 0 top
R164  390  [0603-RES]  58.93,120.14 0 top
R165  390  [0603-RES]  58.96,103.94 0 top
R166  100k  [0603-RES]  30.73,87.12 270 top
R167  100k  [0603-RES]  32.26,87.12 270 top
R168  100k  [0603-RES]  34.8,87.12 270 top
R169  4.7K  [0603-RES]  29.72,126.75 180 top
R170  4.7K  [0603-RES]  29.72,128.02 180 top
R171  33  [0603-RES]  24.38,90.68 0 top
R172  10K  [0603-RES]  24.38,93.22 180 top
R173  1M  [0603-RES]  66.55,93.73 180 top
R174  100k  [0603-RES]  65.28,133.1 0 top
R175  100k  [0603-RES]  65.28,135.64 0 top
R176  10  [0603-RES]  65.28,152.15 0 top
R177  10  [0603-RES]  65.28,149.61 0 top
R178  10  [0603-RES]  65.28,147.07 0 top
R179  10  [0603-RES]  70.36,144.53 0 top
R180  10  [0603-RES]  70.36,141.99 0 top
R181  10  [0603-RES]  70.36,139.45 0 top
R182  10  [0603-RES]  70.36,136.91 0 top
R183  10  [0603-RES]  70.36,134.37 0 top
R184  100  [0603-RES]  39.88,129.29 0 top
R185  100  [0603-RES]  39.88,134.37 0 top
R186  100  [0603-RES]  39.88,133.1 0 top
R187  100  [0603-RES]  39.88,131.83 0 top
R188  100  [0603-RES]  39.88,130.56 0 top
R189  220  [0603-RES]  31.5,145.03 270 top
R190  220  [0603-RES]  29.72,129.54 0 top
R191  220  [0603-RES]  33.53,145.03 270 top
R192  220  [0603-RES]  35.56,145.03 90 top
R193  100k  [0603-RES]  90.68,108.46 180 top
R194  100k  [0603-RES]  90.68,109.73 180 top
R195  100k  [0603-RES]  90.68,112.27 180 top
R196  100k  [0603-RES]  90.68,113.54 180 top
R197  10K  [0603-RES]  90.68,111 180 top
R198  10K  [0603-RES]  107.7,123.7 0 top
R199  330  [0603-RES]  89.92,133.6 90 top
R200  100k  [0603-RES]  139.19,150.88 0 top
R201  100k  [0603-RES]  139.19,148.34 0 top
R202  100k  [0603-RES]  139.19,145.8 0 top
R203  100k  [0603-RES]  143.26,143.26 0 top
R204  100k  [0603-RES]  143.26,140.72 0 top
R205  100k  [0603-RES]  143.26,138.18 0 top
R206  5.62k  [0603-RES]  131.83,106.43 180 top
R207  15K  [0603-RES]  102.36,95.76 180 top
R208  22K  [0603-RES]  102.36,97.03 0 top
R209  2.2  [0603-RES]  130.56,98.81 180 top
R210  240  [0603-RES]  143.26,120.14 0 top
R211  240  [0603-RES]  143.29,103.94 0 top
R212  390  [0603-RES]  136.91,120.14 0 top
R213  390  [0603-RES]  136.94,103.94 0 top
R214  100k  [0603-RES]  108.71,87.12 270 top
R215  100k  [0603-RES]  110.24,87.12 270 top
R216  100k  [0603-RES]  112.78,87.12 270 top
R217  4.7K  [0603-RES]  107.7,126.75 180 top
R218  4.7K  [0603-RES]  107.7,128.02 180 top
R219  33  [0603-RES]  102.36,90.68 0 top
R220  10K  [0603-RES]  102.36,93.22 180 top
R221  1M  [0603-RES]  144.53,93.73 180 top
R222  100k  [0603-RES]  143.26,133.1 0 top
R223  100k  [0603-RES]  143.26,135.64 0 top
R224  10  [0603-RES]  143.26,152.15 0 top
R225  10  [0603-RES]  143.26,149.61 0 top
R226  10  [0603-RES]  143.26,147.07 0 top
R227  10  [0603-RES]  148.34,144.53 0 top
R228  10  [0603-RES]  148.34,141.99 0 top
R229  10  [0603-RES]  148.34,139.45 0 top
R230  10  [0603-RES]  148.34,136.91 0 top
R231  10  [0603-RES]  148.34,134.37 0 top
R232  100  [0603-RES]  117.86,129.29 0 top
R233  100  [0603-RES]  117.86,134.37 0 top
R234  100  [0603-RES]  117.86,133.1 0 top
R235  100  [0603-RES]  117.86,131.83 0 top
R236  100  [0603-RES]  117.86,130.56 0 top
R237  220  [0603-RES]  109.47,145.03 270 top
R238  220  [0603-RES]  107.7,129.54 0 top
R239  220  [0603-RES]  111.51,145.03 270 top
R240  220  [0603-RES]  113.54,145.03 90 top
R241  100k  [0603-RES]  168.66,108.46 180 top
R242  100k  [0603-RES]  168.66,109.73 180 top
R243  100k  [0603-RES]  168.66,112.27 180 top
R244  100k  [0603-RES]  168.66,113.54 180 top
R245  10K  [0603-RES]  168.66,111 180 top
R246  10K  [0603-RES]  185.67,123.7 0 top
R247  330  [0603-RES]  167.89,133.6 90 top
R248  100k  [0603-RES]  217.17,150.88 0 top
R249  100k  [0603-RES]  217.17,148.34 0 top
R250  100k  [0603-RES]  217.17,145.8 0 top
R251  100k  [0603-RES]  221.23,143.26 0 top
R252  100k  [0603-RES]  221.23,140.72 0 top
R253  100k  [0603-RES]  221.23,138.18 0 top
R254  5.62k  [0603-RES]  209.8,106.43 180 top
R255  15K  [0603-RES]  180.34,95.76 180 top
R256  22K  [0603-RES]  180.34,97.03 0 top
R257  2.2  [0603-RES]  208.53,98.81 180 top
R258  240  [0603-RES]  221.23,120.14 0 top
R259  240  [0603-RES]  221.26,103.94 0 top
R260  390  [0603-RES]  214.88,120.14 0 top
R261  390  [0603-RES]  214.91,103.94 0 top
R262  100k  [0603-RES]  186.69,87.12 270 top
R263  100k  [0603-RES]  188.21,87.12 270 top
R264  100k  [0603-RES]  190.75,87.12 270 top
R265  4.7K  [0603-RES]  185.67,126.75 180 top
R266  4.7K  [0603-RES]  185.67,128.02 180 top
R267  33  [0603-RES]  180.34,90.68 0 top
R268  10K  [0603-RES]  180.34,93.22 180 top
R269  1M  [0603-RES]  222.5,93.73 180 top
R270  100k  [0603-RES]  221.23,133.1 0 top
R271  100k  [0603-RES]  221.23,135.64 0 top
R272  10  [0603-RES]  221.23,152.15 0 top
R273  10  [0603-RES]  221.23,149.61 0 top
R274  10  [0603-RES]  221.23,147.07 0 top
R275  10  [0603-RES]  226.31,144.53 0 top
R276  10  [0603-RES]  226.31,141.99 0 top
R277  10  [0603-RES]  226.31,139.45 0 top
R278  10  [0603-RES]  226.31,136.91 0 top
R279  10  [0603-RES]  226.31,134.37 0 top
R280  100  [0603-RES]  195.83,129.29 0 top
R281  100  [0603-RES]  195.83,134.37 0 top
R282  100  [0603-RES]  195.83,133.1 0 top
R283  100  [0603-RES]  195.83,131.83 0 top
R284  100  [0603-RES]  195.83,130.56 0 top
R285  220  [0603-RES]  187.45,145.03 270 top
R286  220  [0603-RES]  185.67,129.54 0 top
R287  220  [0603-RES]  189.48,145.03 270 top
R288  220  [0603-RES]  191.52,145.03 90 top
S1  Reset  [TACTILE-SWITCH-SMD]  19.56,17.53 90 top
S2  DNS  [TACTILE-PTH-SIDEEZ]  11.94,18.03 270 top
S3  User  [TACTILE-SWITCH-SMD]  19.56,68.58 90 top
S4  DNS  [TACTILE-PTH-SIDEEZ]  11.94,68.58 270 top
S5  DNS  [TACTILE-PTH-SIDEEZ]  89.92,18.03 270 top
S6  DNS  [TACTILE-PTH-SIDEEZ]  89.92,68.58 270 top
S7  Reset  [TACTILE-SWITCH-SMD]  97.54,17.53 90 top
S8  User  [TACTILE-SWITCH-SMD]  97.54,68.58 90 top
S9  DNS  [TACTILE-PTH-SIDEEZ]  167.89,18.03 270 top
S10  DNS  [TACTILE-PTH-SIDEEZ]  167.89,68.58 270 top
S11  Reset  [TACTILE-SWITCH-SMD]  175.51,17.53 90 top
S12  User  [TACTILE-SWITCH-SMD]  175.51,68.58 90 top
S13  DNS  [TACTILE-PTH-SIDEEZ]  11.94,92.2 270 top
S14  DNS  [TACTILE-PTH-SIDEEZ]  11.94,142.75 270 top
S15  Reset  [TACTILE-SWITCH-SMD]  19.56,91.69 90 top
S16  User  [TACTILE-SWITCH-SMD]  19.56,142.75 90 top
S17  DNS  [TACTILE-PTH-SIDEEZ]  89.92,92.2 270 top
S18  DNS  [TACTILE-PTH-SIDEEZ]  89.92,142.75 270 top
S19  Reset  [TACTILE-SWITCH-SMD]  97.54,91.69 90 top
S20  User  [TACTILE-SWITCH-SMD]  97.54,142.75 90 top
S21  DNS  [TACTILE-PTH-SIDEEZ]  167.89,92.2 270 top
S22  DNS  [TACTILE-PTH-SIDEEZ]  167.89,142.75 270 top
S23  Reset  [TACTILE-SWITCH-SMD]  175.51,91.69 90 top
S24  User  [TACTILE-SWITCH-SMD]  175.51,142.75 90 top
TP1  AIN2L  [TP_15TH]  57.66,60.2 0 top
TP2  AIN2R  [TP_15TH]  58.93,60.2 0 top
TP3  AOUT5L  [TP_15TH]  53.85,72.39 90 top
TP4  AOUT5R  [TP_15TH]  54.86,72.39 90 top
TP5  SWDIO/TMS  [TP_15TH]  30.99,17.02 90 top
TP6  SWCK/TCK  [TP_15TH]  36.07,14.48 90 top
TP7  TDO  [TP_15TH]  46.23,17.02 90 top
TP8  TDI  [TP_15TH]  42.42,17.02 90 top
TP9  NRESET  [TP_15TH]  25.91,14.48 0 top
TP10  AOUT5L  [TP_15TH]  131.83,72.39 90 top
TP11  AOUT5R  [TP_15TH]  132.84,72.39 90 top
TP12  AIN2L  [TP_15TH]  135.64,60.2 0 top
TP13  AIN2R  [TP_15TH]  136.91,60.2 0 top
TP14  SWDIO/TMS  [TP_15TH]  108.97,17.02 90 top
TP15  SWCK/TCK  [TP_15TH]  114.05,14.48 90 top
TP16  TDO  [TP_15TH]  124.21,17.02 90 top
TP17  TDI  [TP_15TH]  120.4,17.02 90 top
TP18  NRESET  [TP_15TH]  103.89,14.48 0 top
TP19  AOUT5L  [TP_15TH]  209.8,72.39 90 top
TP20  AOUT5R  [TP_15TH]  210.82,72.39 90 top
TP21  AIN2L  [TP_15TH]  213.61,60.2 0 top
TP22  AIN2R  [TP_15TH]  214.88,60.2 0 top
TP23  SWDIO/TMS  [TP_15TH]  186.94,17.02 90 top
TP24  SWCK/TCK  [TP_15TH]  192.02,14.48 90 top
TP25  TDO  [TP_15TH]  202.18,17.02 90 top
TP26  TDI  [TP_15TH]  198.37,17.02 90 top
TP27  NRESET  [TP_15TH]  181.86,14.48 0 top
TP28  AOUT5L  [TP_15TH]  53.85,146.56 90 top
TP29  AOUT5R  [TP_15TH]  54.86,146.56 90 top
TP30  AIN2L  [TP_15TH]  57.66,134.37 0 top
TP31  AIN2R  [TP_15TH]  58.93,134.37 0 top
TP32  SWDIO/TMS  [TP_15TH]  30.99,91.19 90 top
TP33  SWCK/TCK  [TP_15TH]  36.07,88.65 90 top
TP34  TDO  [TP_15TH]  46.23,91.19 90 top
TP35  TDI  [TP_15TH]  42.42,91.19 90 top
TP36  NRESET  [TP_15TH]  25.91,88.65 0 top
TP37  AOUT5L  [TP_15TH]  131.83,146.56 90 top
TP38  AOUT5R  [TP_15TH]  132.84,146.56 90 top
TP39  AIN2L  [TP_15TH]  135.64,134.37 0 top
TP40  AIN2R  [TP_15TH]  136.91,134.37 0 top
TP41  SWDIO/TMS  [TP_15TH]  108.97,91.19 90 top
TP42  SWCK/TCK  [TP_15TH]  114.05,88.65 90 top
TP43  TDO  [TP_15TH]  124.21,91.19 90 top
TP44  TDI  [TP_15TH]  120.4,91.19 90 top
TP45  NRESET  [TP_15TH]  103.89,88.65 0 top
TP46  AOUT5L  [TP_15TH]  209.8,146.56 90 top
TP47  AOUT5R  [TP_15TH]  210.82,146.56 90 top
TP48  AIN2L  [TP_15TH]  213.61,134.37 0 top
TP49  AIN2R  [TP_15TH]  214.88,134.37 0 top
TP50  SWDIO/TMS  [TP_15TH]  186.94,91.19 90 top
TP51  SWCK/TCK  [TP_15TH]  192.02,88.65 90 top
TP52  TDO  [TP_15TH]  202.18,91.19 90 top
TP53  TDI  [TP_15TH]  198.37,91.19 90 top
TP54  NRESET  [TP_15TH]  181.86,88.65 0 top
U1  LM1117  [SOT223]  62.74,40.89 270 top
U2  LM1117  [SOT223]  62.74,24.64 270 top
U3  ATSAMS70N20A-AN  [LQFP100]  36.07,27.18 270 top
U4  AK4618VQ  [LQFP-48]  52.58,65.28 0 top
U5  74AHC1G125  [SOT23-5]  35.81,66.8 0 top
U6  6N138M  [8-SMD]  27.69,62.48 180 top
U7  ATSAMS70N20A-AN  [LQFP100]  114.05,27.18 270 top
U8  LM1117  [SOT223]  140.72,40.89 270 top
U9  LM1117  [SOT223]  140.72,24.64 270 top
U10  AK4618VQ  [LQFP-48]  130.56,65.28 0 top
U11  6N138M  [8-SMD]  105.66,62.48 180 top
U12  74AHC1G125  [SOT23-5]  113.79,66.8 0 top
U13  ATSAMS70N20A-AN  [LQFP100]  192.02,27.18 270 top
U14  LM1117  [SOT223]  218.69,40.89 270 top
U15  LM1117  [SOT223]  218.69,24.64 270 top
U16  AK4618VQ  [LQFP-48]  208.53,65.28 0 top
U17  6N138M  [8-SMD]  183.64,62.48 180 top
U18  74AHC1G125  [SOT23-5]  191.77,66.8 0 top
U19  ATSAMS70N20A-AN  [LQFP100]  36.07,101.35 270 top
U20  LM1117  [SOT223]  62.74,115.06 270 top
U21  LM1117  [SOT223]  62.74,98.81 270 top
U22  AK4618VQ  [LQFP-48]  52.58,139.45 0 top
U23  6N138M  [8-SMD]  27.69,136.65 180 top
U24  74AHC1G125  [SOT23-5]  35.81,140.97 0 top
U25  ATSAMS70N20A-AN  [LQFP100]  114.05,101.35 270 top
U26  LM1117  [SOT223]  140.72,115.06 270 top
U27  LM1117  [SOT223]  140.72,98.81 270 top
U28  AK4618VQ  [LQFP-48]  130.56,139.45 0 top
U29  6N138M  [8-SMD]  105.66,136.65 180 top
U30  74AHC1G125  [SOT23-5]  113.79,140.97 0 top
U31  ATSAMS70N20A-AN  [LQFP100]  192.02,101.35 270 top
U32  LM1117  [SOT223]  218.69,115.06 270 top
U33  LM1117  [SOT223]  218.69,98.81 270 top
U34  AK4618VQ  [LQFP-48]  208.53,139.45 0 top
U35  6N138M  [8-SMD]  183.64,136.65 180 top
U36  74AHC1G125  [SOT23-5]  191.77,140.97 0 top
Y1  11.2896 MHz  [CRYSTAL-OSC-SMD-5X3]  48.77,32.26 90 top
Y2  11.2896 MHz  [CRYSTAL-OSC-SMD-5X3]  126.75,32.26 90 top
Y3  11.2896 MHz  [CRYSTAL-OSC-SMD-5X3]  204.72,32.26 90 top
Y4  11.2896 MHz  [CRYSTAL-OSC-SMD-5X3]  48.77,106.43 90 top
Y5  11.2896 MHz  [CRYSTAL-OSC-SMD-5X3]  126.75,106.43 90 top
Y6  11.2896 MHz  [CRYSTAL-OSC-SMD-5X3]  204.72,106.43 90 top